# Altium PCB GE3.0.PcbDoc
Units mil, origin at the board's own origin, x right, y up, seen from the top; angles counter-clockwise.
Board outline 3543.31 x 1889.76 mil, 2 copper layers (Top Layer, Bottom Layer); 52 components, 120 nets, 376 pads, 110 vias.
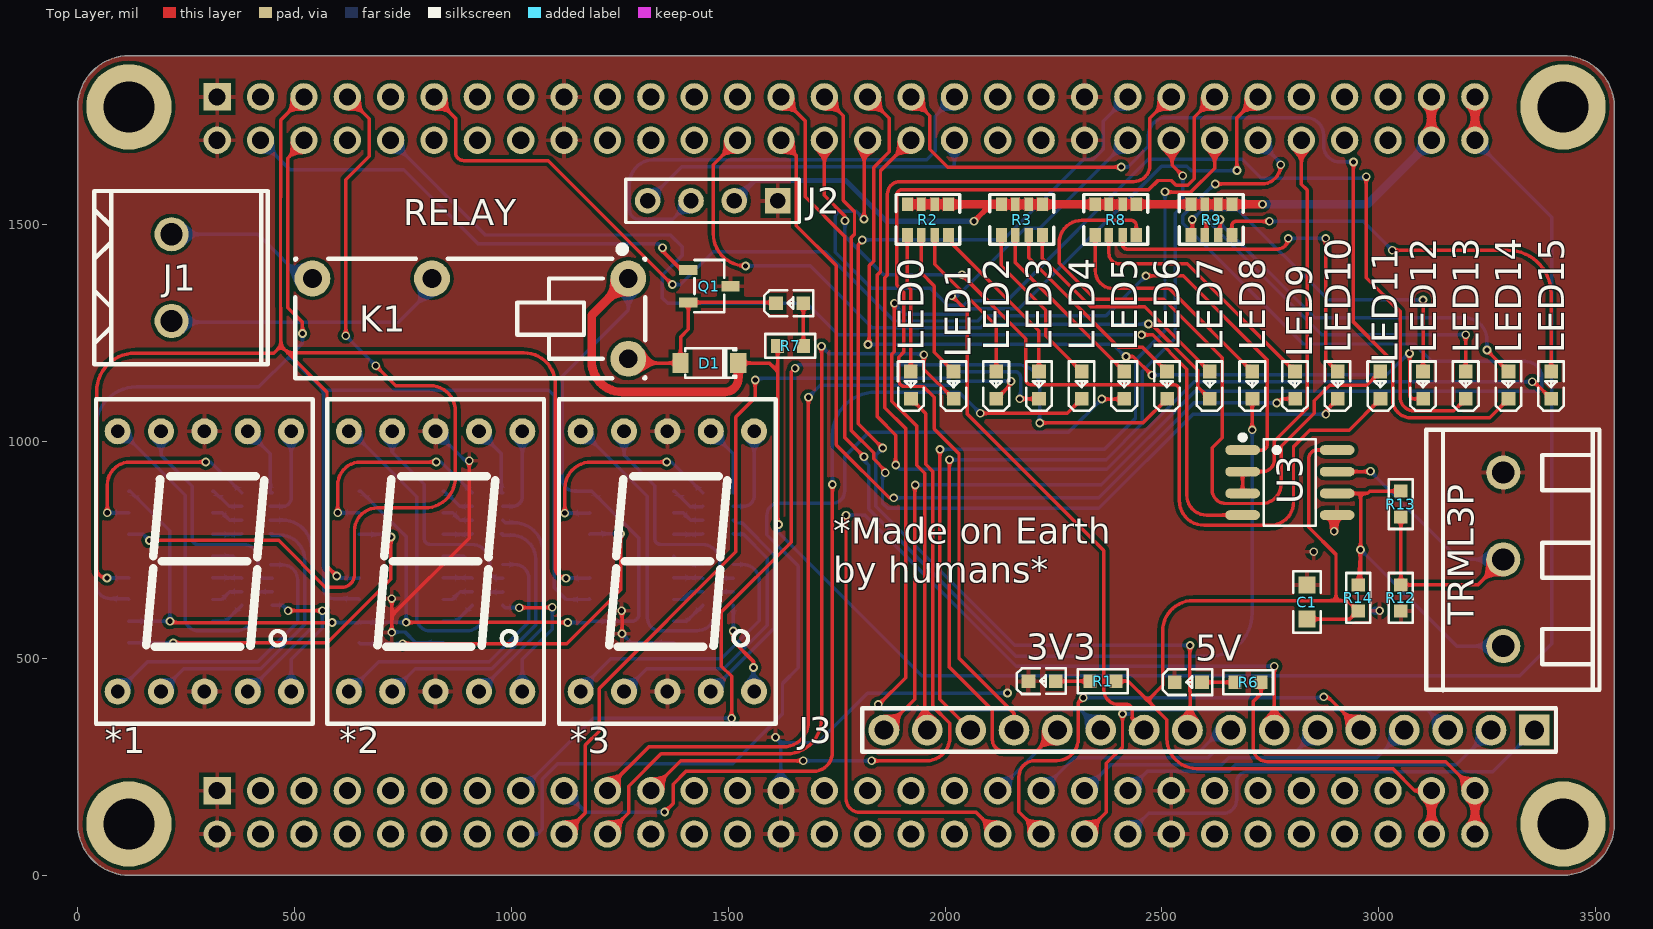
[diagram p0: Top Layer view]
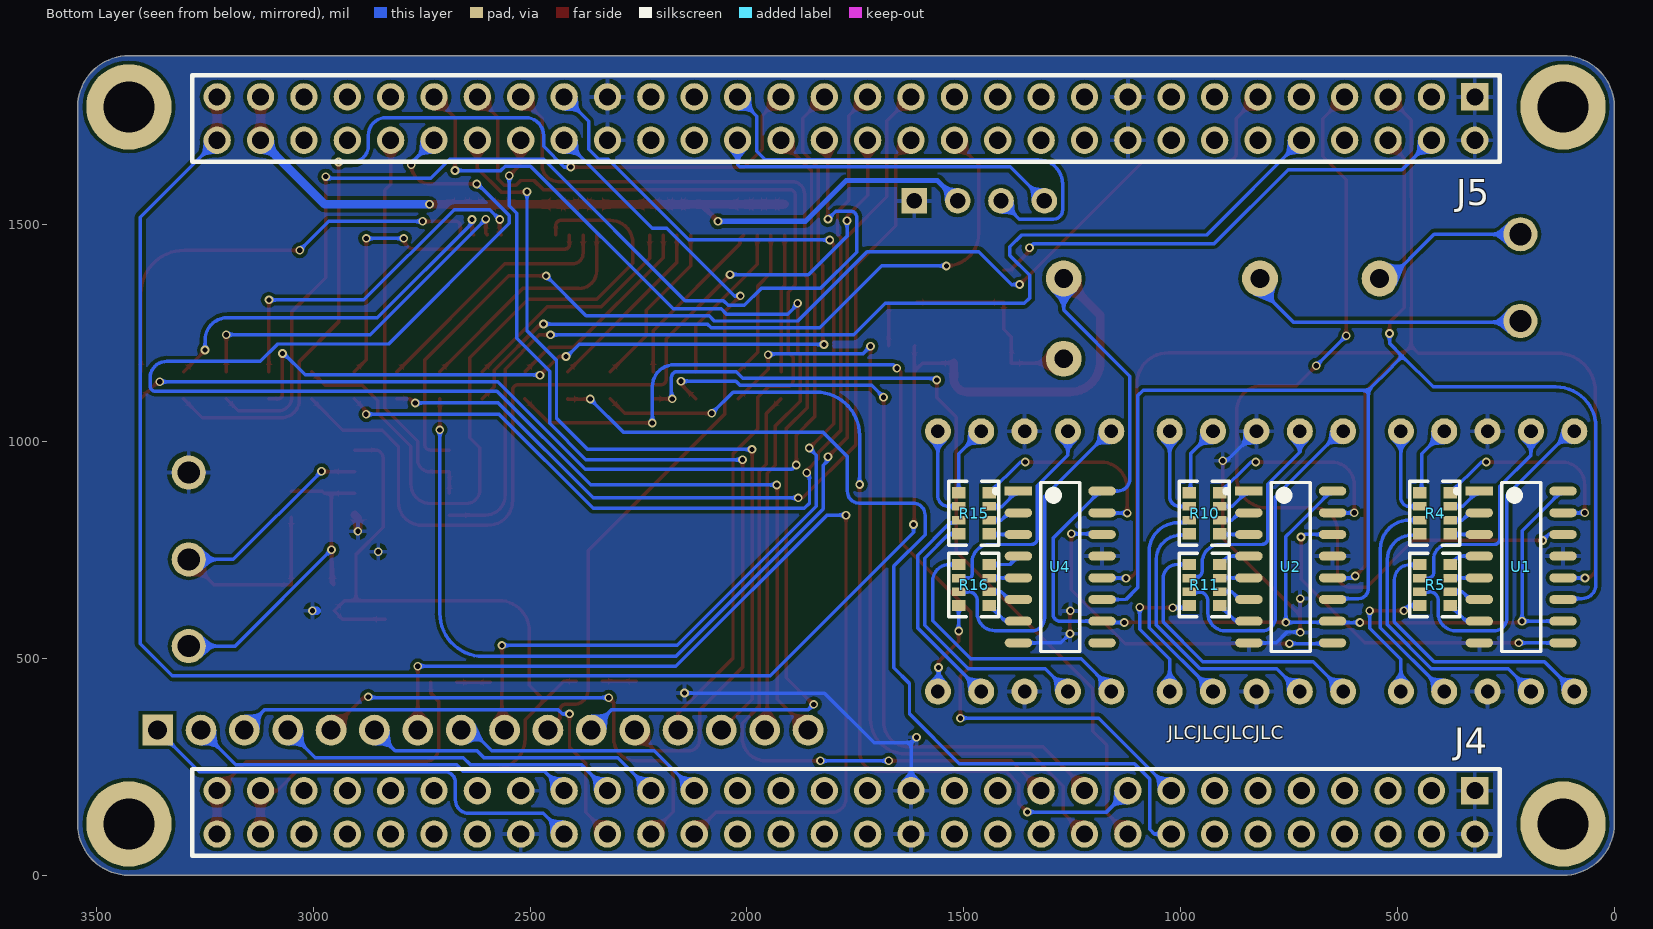
[diagram p1: Bottom Layer view, seen from below]

## Layer stack, top to bottom
Top Solder: solder mask 0.4, Solder Resist, Dk 3.5
Top Layer: signal copper 1.4
Dielectric 1: dielectric 12.6, FR-4, Dk 4.8
Bottom Layer: signal copper 1.4
Bottom Solder: solder mask 0.4, Solder Resist, Dk 3.5

## Board outline
0,118.11 0,1771.65 cw(c118.11,1771.65) 118.11,1889.76 3425.2,1889.76 cw(c3425.2,1771.65) 3543.31,1771.65 3543.31,118.11 cw(c3425.2,118.11) 3425.2,0 118.11,0 cw(c118.11,118.11)

## Design rules (kind name [scope] priority, off if disabled: settings)
Clearance [All] p1: gap=8 ignorepadtopadclearanceinfootprint=FALSE except(0: Arc-Hole Track-Hole SMDPad-Hole THPad-Hole Via-Hole Fill-Hole Poly-Hole Region-Hole Text-Hole; 10: THPad-THPad)
ComponentClearance [All] p1: gap=10 collisioncheckmode=3 verticalgap=0 showdistances=FALSE
HoleSize [All] p1: absolutevalues=TRUE maxlimit=248 minlimit=12 maxpercent=80.000 minpercent=20.000
HoleToHoleClearance [All] p1: gap=2 allowstackedmicrovias=TRUE
MinimumSolderMaskSliver [All] p1: minsoldermaskwidth=0
PlaneConnect [All] p1: planeconnectstyle=Direct reliefexpansion=20 reliefentries=4 reliefconductorwidth=10 reliefairgap=10
PolygonConnect [All] p1: connectstyle=Relief reliefconductorwidth=10 reliefentries=4 polygonreliefangle="90 Angle" airgapwidth=10
RoutingVias [All] p1: holewidth=12 width=20 viastyle="Through Hole" minholewidth=12 minwidth=20 maxholewidth=248 maxwidth=248
SilkToSilkClearance [All] p1: silktosilkclearance=0
SilkToSolderMaskClearance [IsPad] p1: minsilkscreentomaskgap=-1 clearancetoexposedcopper=TRUE
SolderMaskExpansion [IsVia] p1: expansion=4 istentingtop=TRUE
Width [All] p1: maxlimit=100 minlimit=8 preferedwidth=8
23 further rules are at their usual default settings.

## Components (designator, comment, footprint, x,y, rotation, side; value= is the part's Value field where it differs from the comment)
3V3 "NCD0603R1_C84263" LED0603-RD_RED 2223.84,447.3 r0 top
5V "NCD0603R1_C84263" LED0603-RD_RED 2561.02,444.88 r0 top
*1 "7SEG" SM410561N 292.13,723.62 r0 top
*2 "7SEG" SM410561N 825.2,723.62 r0 top
*3 "7SEG" SM410561N 1359.84,723.62 r0 top
C1 "100nF" 0805C 2834.65,629.92 r90 top
D1 "1N4148W" SOD-123_L2.8-W1.8-LS3.7-RD 1456.69,1181.1 r180 top
J1 "Terminal 2P" TRML2P 216.54,1377.95 r270 top
J2 "HDR1X4" HDR1X4 1614.17,1555.12 r180 top
J3 "HDR1X16" HDR1X16 2609.06,334.65 r180 top
J4 "HDR2X30" HDR2x30 1771.65,144.88 r0 bottom locked
J5 "HDR2X30" HDR2x30 1771.65,1744.88 r0 bottom
K1 "HF46F" RELAY-TH_HF46F-5-HS1T 905.51,1283.46 r180 top
LED0 "NCD0603R1_C84263" LED0603-RD_RED 1921.4,1129.94 r90 top
LED1 "NCD0603R1_C84263" LED0603-RD_RED 2019.82,1129.94 r90 top
LED2 "NCD0603R1_C84263" LED0603-RD_RED 2118.25,1129.94 r90 top
LED3 "NCD0603R1_C84263" LED0603-RD_RED 2216.67,1129.94 r90 top
LED4 "NCD0603R1_C84263" LED0603-RD_RED 2315.1,1129.94 r90 top
LED5 "NCD0603R1_C84263" LED0603-RD_RED 2413.52,1129.94 r90 top
LED6 "NCD0603R1_C84263" LED0603-RD_RED 2511.95,1129.94 r90 top
LED7 "NCD0603R1_C84263" LED0603-RD_RED 2610.37,1129.94 r90 top
LED8 "NCD0603R1_C84263" LED0603-RD_RED 2708.8,1129.94 r90 top
LED9 "NCD0603R1_C84263" LED0603-RD_RED 2807.22,1129.94 r90 top
LED10 "NCD0603R1_C84263" LED0603-RD_RED 2905.65,1129.94 r90 top
LED11 "NCD0603R1_C84263" LED0603-RD_RED 3004.07,1129.94 r90 top
LED12 "NCD0603R1_C84263" LED0603-RD_RED 3102.5,1129.94 r90 top
LED13 "NCD0603R1_C84263" LED0603-RD_RED 3200.92,1129.94 r90 top
LED14 "NCD0603R1_C84263" LED0603-RD_RED 3299.35,1129.94 r90 top
LED15 "NCD0603R1_C84263" LED0603-RD_RED 3397.77,1129.94 r90 top
Q1 "S8550" SOT-23-3_L2.9-W1.6-P1.90-LS2.8-BR 1456.69,1358.27 r180 top
R1 "1k" 0603R 2363.98,447.44 r0 top
R2 "1k" RES-ARRAY-SMD_0603-8P-L3.2-W1.6-BL 1960.63,1511.81 r0 top
R3 "1k" RES-ARRAY-SMD_0603-8P-L3.2-W1.6-BL 2177.17,1511.81 r0 top
R4 "470" RES-ARRAY-SMD_0603-8P-L3.2-W1.6-BL 413.39,834.65 r90 bottom
R5 "470" RES-ARRAY-SMD_0603-8P-L3.2-W1.6-BL 413.39,669.29 r90 bottom
R6 "1k" 0603R 2698.82,444.88 r0 top
R7 "1k" 0603R 1643.31,1220.47 r180 top
R8 "1k" RES-ARRAY-SMD_0603-8P-L3.2-W1.6-BL 2393.7,1511.81 r0 top
R9 "1k" RES-ARRAY-SMD_0603-8P-L3.2-W1.6-BL 2614.18,1511.81 r0 top
R10 "470" RES-ARRAY-SMD_0603-8P-L3.2-W1.6-BL 944.88,834.65 r90 bottom
R11 "470" RES-ARRAY-SMD_0603-8P-L3.2-W1.6-BL 944.88,669.3 r90 bottom
R12 "360" 0603R 3051.18,639.37 r270 top
R13 "120" 0603R 3051.18,855.91 r90 top
R14 "360" 0603R 2952.76,639.37 r90 top
R15 "470" RES-ARRAY-SMD_0603-8P-L3.2-W1.6-BL 1476.38,834.64 r90 bottom
R16 "470" RES-ARRAY-SMD_0603-8P-L3.2-W1.6-BL 1476.38,669.29 r90 bottom
RELAY "NCD0603R1_C84263" LED0603-RD_RED 1641.75,1318.76 r0 top
TRML3P "J6" TRML3P 3287.4,728.35 r270 top
U1 "74HC595D,118" FP-SOT109-1-IPC_C 214.6,710.83 r180 bottom
U2 "74HC595D,118" FP-SOT109-1-IPC_C 746.1,710.83 r180 bottom
U3 "SP3485" SP3485 2795.28,905.51 r270 top
U4 "74HC595D,118" FP-SOT109-1-IPC_C 1277.59,710.83 r180 bottom

## Footprints (in the part's own frame and the unit in brackets; to place one, negate y for a bottom-side part, rotate by r counter-clockwise, add the part's x,y. Pads: shape width x height; smd on the part's side, far side on the other; paste and mask are expansions set on the pad)
0603R [mm]
  rect 0.76x0.8 smd: 1(-0.76,0) 2(0.76,0)
  silkscreen extent -1.46,-0.7 1.46,0.7
0805C [mm]
  rect 1x1 smd: 1(-1,0) 2(1,0)
  silkscreen extent -1.8,-0.8 1.8,0.8
FP-SOT109-1-IPC_C [mil]
  rect 63.17x20.79 smd paste+0 mask+0: 1(-96.49,175)
  rrect100% 63.17x20.79 smd paste+0 mask+0: 2(-96.49,125) 3(-96.49,75) 4(-96.49,25) 5(-96.49,-25) 6(-96.49,-75) 7(-96.49,-125) 8(-96.49,-175) 9(96.49,-175) 10(96.49,-125) 11(96.49,-75) 12(96.49,-25) 13(96.49,25) 14(96.49,75) 15(96.49,125) 16(96.49,175)
  silkscreen extent -153,-195 45,195, body extent -118,-195 118,195, height 69
HDR1X4 [mm] "Connector; Header; 4 Position"
  rect 1.5x1.5 hole 0.9: 1(0,0)
  round 1.5 hole 0.9: 2(2.54,0) 3(5.08,0) 4(7.62,0)
  silkscreen extent -1.27,-1.27 8.89,1.27
HDR1X16 [mm]
  rect 1.8x1.8 hole 1.1: 1(-19.05,0)
  round 1.8 hole 1.1: 2(-16.51,0) 3(-13.97,0) 4(-11.43,0) 5(-8.89,0) 6(-6.35,0) 7(-3.81,0) 8(-1.27,0) 9(1.27,0) 10(3.81,0) 11(6.35,0) 12(8.89,0) 13(11.43,0) 14(13.97,0) 15(16.51,0) 16(19.05,0)
  silkscreen extent -20.32,-1.27 20.32,1.27
HDR2x30 [mm]
  rect 1.6x1.6 hole 1: 1(-36.83,-1.27)
  round 1.6 hole 1: 2(-36.83,1.27) 3(-34.29,-1.27) 4(-34.29,1.27) 5(-31.75,-1.27) 6(-31.75,1.27) 7(-29.21,-1.27) 8(-29.21,1.27) 9(-26.67,-1.27) 10(-26.67,1.27) 11(-24.13,-1.27) 12(-24.13,1.27) 13(-21.59,-1.27) 14(-21.59,1.27) 15(-19.05,-1.27) 16(-19.05,1.27) 17(-16.51,-1.27) 18(-16.51,1.27) 19(-13.97,-1.27) 20(-13.97,1.27) 21(-11.43,-1.27) 22(-11.43,1.27) 23(-8.89,-1.27) 24(-8.89,1.27) 25(-6.35,-1.27) 26(-6.35,1.27) 27(-3.81,-1.27) 28(-3.81,1.27) 29(-1.27,-1.27) 30(-1.27,1.27) 31(1.27,-1.27) 32(1.27,1.27) 33(3.81,-1.27) 34(3.81,1.27) 35(6.35,-1.27) 36(6.35,1.27) 37(8.89,-1.27) 38(8.89,1.27) 39(11.43,-1.27) 40(11.43,1.27) 41(13.97,-1.27) 42(13.97,1.27) 43(16.51,-1.27) 44(16.51,1.27) 45(19.05,-1.27) 46(19.05,1.27) 47(21.59,-1.27) 48(21.59,1.27) 49(24.13,-1.27) 50(24.13,1.27) 51(26.67,-1.27) 52(26.67,1.27) 53(29.21,-1.27) 54(29.21,1.27) 55(31.75,-1.27) 56(31.75,1.27) 57(34.29,-1.27) 58(34.29,1.27) 59(36.83,-1.27) 60(36.83,1.27)
  silkscreen extent -38.3,-2.54 38.3,2.54
LED0603-RD_RED [mm]
  rect 0.8x0.8 smd: 1(-0.8,-0.003) 2(0.8,0.004)
  silkscreen extent -1.49,-0.75 1.39,0.76
RELAY-TH_HF46F-5-HS1T [mm] "继电器5v"
  round 2.1 hole 1.1: 1(-9.25,-2.35) 2(2.25,-2.35) 3(9.25,-2.35) 6(-9.25,2.35)
  silkscreen extent -10.25,-4.26 10.25,3.5
RES-ARRAY-SMD_0603-8P-L3.2-W1.6-BL [mm]
  rect 0.65x0.8 smd: 1(-1.2,-0.9) 4(1.2,-0.9) 5(1.2,0.9) 8(-1.2,0.9)
  rect 0.5x0.8 smd: 2(-0.4,-0.9) 3(0.4,-0.9) 6(0.4,0.9) 7(-0.4,0.9)
  silkscreen extent -1.87,-1.45 1.87,1.47
SM410561N [mil] "一位数码管 方舟出品"
  round 60 hole 31.5: 1(-200,-300) 2(-100,-300) 3(0,-300) 4(100,-300) 5(200,-300) 6(200,300) 7(100,300) 8(0,300) 9(-100,300) 10(-200,300)
  silkscreen extent -250,-374 250,374
SOD-123_L2.8-W1.8-LS3.7-RD [mm]
  rect 0.95x1.15 smd paste+0 mask+0.051: 1(-1.692,0) 2(1.692,0)
  silkscreen extent -1.58,-0.87 1.41,0.87
SOT-23-3_L2.9-W1.6-P1.90-LS2.8-BR [mm] "S8050/S8550"
  rect 1.07x0.6 smd paste+0 mask+0.051: 1(1.235,-0.95) 2(1.235,0.95) 3(-1.235,0)
  silkscreen extent -0.88,-1.54 0.88,1.54
SP3485 [mil] "SP3485"
  oval 22.6x80.14 smd: 1(-75,-108.97) 2(-25,-108.97) 3(25,-108.97) 4(75,-108.97) 5(75,108.97) 6(25,108.97) 7(-25,108.97) 8(-75,108.97)
  silkscreen extent -110,-115 99,60
TRML2P [mm] "2P接线端子C8465"
  round 2 hole 1.3: 1(-2.54,0) 2(2.54,0)
  silkscreen extent -5.08,-4.52 5.08,5.64
TRML3P [mm] "3P接线端子直针C72334"
  round 2 hole 1.3: 1(-5.08,0) 2(0,0) 3(5.08,0)
  silkscreen extent -7.61,-4.53 7.66,5.64

## Part data
3V3 5V LED0 LED1 LED2 LED3 LED4 LED5 LED6 LED7 LED8 LED9 LED10 LED11 LED12 LED13 LED14 LED15: Emitted Color=红灯, JLCPCB Part Class="Extended Part", Manufacturer=国星光电, Manufacturer Part=NCD0603R1, Add into BOM=yes, Convert to PCB=yes, Datasheet=https://atta.szlcsc.com/upload/public/pdf/source/20200820/C84263_DABC6A75E58F576973B407FDBA283D60.pdf, Device=NCD0603R1_C84263, LCSC Part Name=红灯, Name=NCD0603R1, Supplier=LCSC, Supplier Footprint=0603, Supplier Part=C84263, Symbol=FC-DA1608HRK-620D
*1 *2 *3: "一位数码管"
C1: library part CAP, "电容"
D1: "二极管"
J1: library part TRML2P, "2P接线端子"
J2: "Connector"
K1: "5V一路继电器宏发C5252509 / https://item.szlcsc.com/5969785.html"
Q1: "PNP"
R1 R6 R7 R12 R13 R14: library part Res2, "Resistor"
R2 R3 R4 R5 R8 R9 R10 R11 R15 R16: library part RES_ARRAY_0603
RELAY: library part LED_0603, Emitted Color=红灯, JLCPCB Part Class="Extended Part", Manufacturer=国星光电, Manufacturer Part=NCD0603R1, Add into BOM=yes, Convert to PCB=yes, Datasheet=https://atta.szlcsc.com/upload/public/pdf/source/20200820/C84263_DABC6A75E58F576973B407FDBA283D60.pdf, Device=NCD0603R1_C84263, LCSC Part Name=红灯, Name=NCD0603R1, Supplier=LCSC, Supplier Footprint=0603, Supplier Part=C84263, Symbol=FC-DA1608HRK-620D
TRML3P: library part TRML3P, "3P接线端子直针"
U1 U2 U4: library part CMP-14351-000006-1, "IC SHIFT REGISTER 8BIT 16SOIC", RoHS Compliant=Yes

## Free pads (board coordinates)
  round 196.85 hole 118.11: 0(118.11,118.11) 0(3425.2,118.11) 0(3425.2,1771.65)
  round 196.85 hole 118.11 unplated: 0(118.11,1771.65)

## Via types
v1: diameter 20, hole 12, Top Layer to Bottom Layer, tented both sides, 110 vias

## Nets (pads, with @x,y where several pads share a name; then routed paths per layer and width w, separated by ;. In a path a pad name is that pad's centre, name@x,y a point inside that pad or via, vN(x,y) a via of type N, cw(c..) or ccw(c..) an arc to the next point about the centre after c; other vN are vias at no path point)
3V3DOWN: C1.1 J4.57 J4.58 R1.2 R14.1 U3.8 | length 2198.7
  Top Layer w8: R1.2 2422.64,447.44 2467.13,402.95 ; C1.1 2933.07,590.55 2951.97,609.45 2928.06,633.35 2901.57,633.35 ; U3.8 2858.24,980.51 ccw(c2858.24,960.86) 2838.58,960.86 2838.58,802.67 2901.57,739.68 2901.57,633.35 ; J4.57 3083.17,194.88 3032.03,246.02 2580.6,246.02 cw(c2580.6,315) 2511.62,315 2511.62,358.46 2467.13,402.95 ; 2467.13,402.95 2501.79,437.61 2501.79,562.57 cw(c2572.57,562.57) 2572.57,633.35 2901.57,633.35
  Top Layer w20: J4.58 J4.57
3V3UP: J2.2 J5.57 J5.58 R2.5 R2.6 R2.7 R2.8 R3.5 R3.6 R3.7 R3.8 R8.5 R8.6 R8.7 R8.8 R9.5 R9.6 R9.7 R9.8 | length 2039.4
  Top Layer w8: 2106.07,1547.02 2106.3,1547.25 ; J5.58@3121.24,1695.3 J5.58 ; J5.57@3121.24,1794.46 J5.57
  Top Layer w12: v1(2066.93,1507.87) 2106.07,1547.02
  Top Layer w20: R2.8 R2.7 R2.6 R2.5 2007.87,1547.02 2106.07,1547.02 ; 2106.3,1547.25 R3.8 2129.93,1547.02 R3.7@2161.42,1547.02 ; R3.7 R3.7@2161.42,1547.02 ; R3.6 R3.6@2192.92,1547.02 ; R3.5 R3.5@2224.41,1547.02 ; R8.8 R8.8@2346.46,1547.02 ; R8.7 R8.7@2377.95,1547.02 ; R9.7 R9.7@2598.43,1547.02 ; R9.6 R9.6@2629.93,1547.02 ; R9.5@2661.42,1547.02 2661.64,1547.24 v1(2732.28,1547.24) ; R9.5 2661.18,1547.02 R9.6@2629.93,1547.02 ; J5.58@3121.24,1695.3 J5.57@3121.24,1794.46 ; R3.7@2161.42,1547.02 R3.6@2192.92,1547.02 ; R3.6@2192.92,1547.02 R3.5@2224.41,1547.02 ; R3.5@2224.41,1547.02 R8.8@2346.46,1547.02 ; R8.8@2346.46,1547.02 R8.7@2377.95,1547.02 ; R8.7@2377.95,1547.02 2409.45,1547.02 R8.6 R8.5 2534.23,1547.24 R9.8 2566.94,1547.02 R9.7@2598.43,1547.02 ; R9.7@2598.43,1547.02 R9.6@2629.93,1547.02
  Bottom Layer w12: J2.2 1561.42,1602.36 1770.89,1602.36 1865.38,1507.87 v1(2066.93,1507.87)
  Bottom Layer w20: v1(2732.28,1547.24) 2974.02,1547.24 J5.58
5VDOWN: J4.59 J4.60 R6.2 | length 815.4
  Top Layer w8: R6.2 2728.74,419.02 2711.24,401.51 2711.24,293.31 ccw(c2742.53,293.31) 2742.53,262.02 3154.52,262.02 J4.59@3222.24,194.3 ; J4.60 J4.60@3222.24,95.46
  Top Layer w20: J4.60@3222.24,95.46 J4.59@3222.24,194.3
5VUP: D1.1 J5.59 J5.60 K1.1 R7.2 U1.10 U1.16 U2.10 U2.16 U4.10 U4.16 | length 7292.7
  Top Layer w8: v1(212.6,585.83) 215.75,582.68 v1(586.61,582.68) ; v1(757.24,583.02) 1129.58,583.02 v1(1129.92,582.68) ; D1.1 1594.49,1181.1 1614.17,1161.42 ; R7.2 1614.17,1219.68 1614.17,1161.42 ; v1(1615.81,808.85) 1615.81,812.26 1614.24,813.84 1614.24,1161.35 1614.17,1161.42 ; J5.60 J5.60@3222.24,1695.46 ; J5.59 J5.59@3222.24,1794.3
  Top Layer w20: K1.1 1185.04,1291.34 1185.04,1185.21 ccw(c1256.08,1185.21) 1256.08,1114.17 1491.48,1114.17 ccw(c1491.48,1146.02) 1523.32,1146.02 D1.1 ; J5.60@3222.24,1695.46 J5.59@3222.24,1794.3
  Bottom Layer w8: U1.10 v1(212.6,585.83) 212.6,794.2 120.97,885.83 U1.16 ; v1(586.61,582.68) 646.46,582.68 U2.10 652.75,582.68 653.09,583.02 v1(757.24,583.02) 757.24,781.05 744.09,794.2 652.47,885.83 U2.16 ; v1(1129.92,582.68) 1177.95,582.68 U4.10 1278.05,585.83 ccw(c1278.05,602.02) 1294.24,602.02 1294.24,776.63 1185.04,885.83 U4.16 1145.24,885.83 cw(c1145.24,913.83) 1117.24,913.83 1117.24,1151.02 1269.68,1303.46 K1.1 ; v1(1615.81,808.85) 1615.81,790.44 1946.24,460.02 3325.24,460.02 3399.24,534.02 3399.24,1517.3 J5.60
GND: 3V3.1 5V.1 *1.3 *1.8 *2.3 *2.8 *3.3 *3.8 C1.2 J2.1 J4.1 J4.2 J4.27 J4.28 J4.45 J4.46 J5.1 J5.2 J5.17 J5.18 J5.41 J5.42 Q1.3 R12.2 TRML3P.1 U1.8 U1.13 U2.8 U2.13 U3.5 U4.8 U4.13 | length 1673.1
  Top Layer w8: v1(724.09,637.87) 724.24,637.73 724.24,598.87 ; v1(724.24,560.02) 724.24,598.87 ; v1(902.71,955.62) 902.71,777.35 724.24,598.87 ; v1(1254.24,610.02) 1255.24,609.02 v1(1255.24,557.02)
  Top Layer w20: v1(2897.24,793.02) 2897.24,823.51 U3.5
  Bottom Layer w8: v1(724.24,560.02) 725.1,560.88 754.8,560.88 779.86,535.83 U2.8 ; *2.8 893.2,955.62 v1(902.71,955.62) ; v1(1255.24,557.02) 1276.43,535.83 U4.8 ; v1(1609.24,318.02) 1621.65,305.6 ; J4.27 1621.65,305.6 ; v1(2144.24,420.02) 1821.24,420.02 1706.82,305.6 1621.65,305.6
  Bottom Layer w20: v1@2992.24,610.02 v1(3002.24,610.02)
  other v1: 2850.24,746.02
Net3V3_2: 3V3.2 R1.1 | length 78.7
  Top Layer w8: 3V3.2 R1.1
Net5V_2: 5V.2 R6.1 | length 76.5
  Top Layer w8: 5V.2 2592.64,444.88 R6.1
NetD1_2: D1.2 K1.6 Q1.2 RELAY.1 | length 474.8
  Top Layer w8: K1.6 1279.52,1181.1 D1.2 1390.06,1241.02 1408.07,1259.02 Q1.2 1608.03,1320.87 RELAY.1
NetJ1_1: J1.1 K1.3 | length 376.8
  Bottom Layer w8: J1.1 415.75,1477.95 529.53,1364.17 K1.3@541.34,1352.36
NetJ1_2: J1.2 K1.2 | length 633.5
  Bottom Layer w8: J1.2 219.23,1275.26 739.83,1275.26 K1.2@816.93,1352.36
NetLED0_2: LED0.2 R2.1 | length 318.2
  Top Layer w8: R2.1 1913.39,1358.86 1921.26,1350.99 LED0.2
NetLED1_2: LED1.2 R2.2 | length 345.9
  Top Layer w8: R2.2 1944.88,1389.02 1975.24,1358.66 1975.24,1205.87 LED1.2
NetLED2_2: LED2.2 R2.3 | length 373.7
  Top Layer w8: R2.3 1976.38,1408.76 2035.12,1350.02 2118.11,1267.03 LED2.2
NetLED3_2: LED3.2 R2.4 | length 401.4
  Top Layer w8: R2.4 2016.63,1467.62 2016.63,1455.62 2216.54,1255.72 LED3.2
NetLED4_2: LED4.2 R3.1 | length 391.6
  Top Layer w8: R3.1 2129.93,1405.54 2232.54,1302.93 2232.54,1243.84 LED4.2
NetLED5_2: LED5.2 R3.2 | length 419.3
  Top Layer w8: R3.2 2161.42,1413.38 LED5.2
NetLED6_2: LED6.2 R3.3 | length 479.8
  Top Layer w8: R3.3 2192.92,1424.33 2399.24,1218.02 2455.21,1218.02 LED6.2
NetLED7_2: LED7.2 R3.4 | length 547.5
  Top Layer w8: R3.4 2224.41,1423.02 2336.41,1311.02 2460.64,1311.02 LED7.2
NetLED8_2: LED8.2 R8.1 | length 547.3
  Top Layer w8: R8.1 2346.46,1394.02 ccw(c2387.46,1394.02) 2387.46,1353.02 2517.06,1353.02 LED8.2
NetLED9_2: LED9.2 R8.2 | length 588.2
  Top Layer w8: R8.2 2377.95,1434.02 ccw(c2401.95,1434.02) 2401.95,1410.02 2558.49,1410.02 LED9.2
NetLED10_2: LED10.2 R8.3 | length 829
  Top Layer w8: R8.3 2409.45,1454.02 ccw(c2419.45,1454.02) 2419.45,1444.02 2766.85,1444.02 ccw(c2766.85,1468.5) v1(2791.34,1468.5) ; v1(2877.95,1468.5) 2877.95,1188.98 LED10.2
  Bottom Layer w8: v1(2791.34,1468.5) v1(2877.95,1468.5)
NetLED11_2: LED11.2 R8.4 | length 1670
  Top Layer w8: R8.4 2440.94,1498.28 ccw(c2429.21,1498.28) 2429.21,1510.02 2315.24,1510.02 ccw(c2315.24,1458.02) 2263.24,1458.02 2263.24,1411.02 2346.24,1328.02 2504.24,1328.02 2639.24,1193.02 2639.24,1009.02 2616.24,986.02 2616.24,888.02 ccw(c2647.04,888.02) 2647.04,857.21 2730.24,857.21 ccw(c2730.24,902.08) 2775.11,902.08 2775.11,988.89 2851.24,1065.02 2851.24,1094.02 2887.24,1130.02 2972.53,1130.02 LED11.2
NetLED12_2: LED12.2 R9.1 | length 832.8
  Top Layer w8: R9.1 2573.24,1482.68 2570.24,1485.68 v1(2570.24,1512.13) ; LED12.2 v1(3102.36,1326.77)
  Bottom Layer w8: v1(2570.24,1512.13) 2593.12,1535.02 2675.42,1535.02 2883.66,1326.77 v1(3102.36,1326.77)
NetLED13_2: LED13.2 R9.2 | length 832.3
  Top Layer w8: R9.2 2602.24,1480.19 v1(2602.24,1513.02) ; LED13.2 v1(3200.79,1246.46)
  Bottom Layer w8: v1(2602.24,1513.02) 2602.24,1512.9 2868.68,1246.46 v1(3200.79,1246.46)
NetLED14_2: LED14.2 R9.3 | length 874.4
  Top Layer w8: R9.3 2634.24,1480.69 v1(2634.24,1512.02) ; v1(3249.61,1211.02) LED14.2
  Bottom Layer w8: v1(2634.24,1512.02) 2634.24,1504.31 2633.86,1503.94 2852.16,1285.64 3197.99,1285.64 cw(c3197.99,1234.02) 3249.61,1234.02 v1(3249.61,1211.02)
NetLED15_2: LED15.2 R9.4 | length 1027.8
  Top Layer w8: R9.4 2661.42,1498.05 cw(c2671.24,1498.05) 2671.24,1507.87 2692.91,1507.87 v1(2748.03,1507.87) ; v1(3031.5,1440.95) 3297.64,1440.95 cw(c3297.64,1340.95) 3397.64,1340.95 LED15.2
  Bottom Layer w8: v1(2748.03,1507.87) 2964.57,1507.87 v1(3031.5,1440.95)
NetR4_1: R4.1 U1.3 | length 67.5
  Bottom Layer w8: U1.3 376.37,785.83 R4.1
NetR4_2: R4.2 U1.2 | length 73.9
  Bottom Layer w8: U1.2 333.47,835.83 350.39,818.9 R4.2
NetR4_3: R4.3 U1.1 | length 81.5
  Bottom Layer w8: U1.1 313.95,885.83 349.38,850.4 R4.3
NetR4_4: R4.4 U1.15 | length 483.5
  Top Layer w8: v1(68.11,835.83) 68.11,899.96 cw(c120.9,899.96) 120.9,952.76 v1(295.27,952.76)
  Bottom Layer w8: v1(68.11,835.83) U1.15 ; v1(295.27,952.76) 307.08,952.76 R4.4
NetR5_1: R5.1 U1.7 | length 81.9
  Bottom Layer w8: U1.7 341.72,585.83 R5.1
NetR5_2: R5.2 U1.6 | length 74.2
  Bottom Layer w8: U1.6 332.68,635.83 350.39,653.54 R5.2
NetR5_3: R5.3 U1.5 | length 67.2
  Bottom Layer w8: U1.5 377.17,685.83 R5.3
NetR5_4: R5.4 U1.4 | length 74.8
  Bottom Layer w8: U1.4 358.66,735.83 R5.4
NetR7_1: R7.1 RELAY.2 | length 98.4
  Top Layer w8: R7.1 RELAY.2
NetR10_1: R10.1 U2.3 | length 67.5
  Bottom Layer w8: U2.3 907.87,785.83 R10.1
NetR10_2: R10.2 U2.2 | length 73.9
  Bottom Layer w8: U2.2 864.96,835.83 881.89,818.9 R10.2
NetR10_3: R10.3 U2.1 | length 81.5
  Bottom Layer w8: U2.1 845.45,885.83 880.88,850.4 R10.3
NetR10_4: R10.4 U2.15 | length 483.5
  Top Layer w8: v1(599.61,835.83) 599.61,899.97 cw(c652.4,899.97) 652.4,952.76 v1(826.77,952.76)
  Bottom Layer w8: v1(599.61,835.83) U2.15 ; v1(826.77,952.76) 838.58,952.76 R10.4
NetR11_1: R11.1 U2.7 | length 81.9
  Bottom Layer w8: U2.7 873.22,585.83 R11.1
NetR11_2: R11.2 U2.6 | length 74.2
  Bottom Layer w8: U2.6 864.17,635.83 881.89,653.55 R11.2
NetR11_3: R11.3 U2.5 | length 67.2
  Bottom Layer w8: U2.5 908.66,685.83 R11.3
NetR11_4: R11.4 U2.4 | length 74.8
  Bottom Layer w8: U2.4 890.15,735.83 R11.4
NetR12_1: R12.1 R13.1 TRML3P.2 U3.7 | length 885.3
  Top Layer w8: U3.7 2979.73,930.51 v1(2980.98,931.76) ; R13.1 R12.1 3228.35,669.29 TRML3P.2
  Bottom Layer w8: v1(2980.98,931.76) 3184.4,728.35 TRML3P.2
NetR13_2: R13.2 R14.2 TRML3P.3 U3.6 | length 865.4
  Top Layer w8: U3.6 2958.24,880.51 ; R13.2 2979.55,885.83 2974.24,880.51 2958.24,880.51 ; v1(2958.21,750.65) 2958.21,674.75 R14.2 v1(2958.21,750.65) ; v1(2958.21,750.65) 2958.24,751.03 2958.24,880.51
  Bottom Layer w8: v1(2958.21,750.65) 3180.51,528.35 TRML3P.3
NetR15_1: R15.1 U4.3 | length 67.5
  Bottom Layer w8: U4.3 1439.37,785.83 R15.1
NetR15_2: R15.2 U4.2 | length 73.9
  Bottom Layer w8: U4.2 1396.46,835.83 1413.39,818.9 R15.2
NetR15_3: R15.3 U4.1 | length 82
  Bottom Layer w8: U4.1 1376.95,885.83 1412.88,849.89 1440.44,849.89 R15.3
NetR15_4: R15.4 U4.15 | length 497
  Top Layer w8: v1(1123.24,835.02) 1123.24,892.1 cw(c1183.9,892.1) 1183.9,952.76 v1(1358.27,952.76)
  Bottom Layer w8: v1(1123.24,835.02) 1180.29,835.02 U4.15 ; v1(1358.27,952.76) 1370.07,952.76 R15.4
NetR16_1: R16.1 U4.7 | length 81.9
  Bottom Layer w8: U4.7 1404.72,585.83 R16.1
NetR16_2: R16.2 U4.6 | length 74.2
  Bottom Layer w8: U4.6 1395.67,635.83 1413.39,653.54 R16.2
NetR16_3: R16.3 U4.5 | length 67.2
  Bottom Layer w8: U4.5 1440.16,685.83 R16.3
NetR16_4: R16.4 U4.4 | length 74.9
  Bottom Layer w8: U4.4 1393.38,716.53 R16.4
NetU1_9: U1.9 U2.14 | length 837.4
  Top Layer w8: v1(220.08,535.83) 575.2,535.83 722.24,682.87 v1(722.24,780.02)
  Bottom Layer w8: U1.9 v1(220.08,535.83) ; U2.14 649.8,786.02 712.99,786.02 718.99,780.02 v1(722.24,780.02)
NetU2_9: U2.9 U4.14 | length 855.5
  Top Layer w8: v1(749.24,534.02) 1128.11,534.02 1129.92,535.83 1251.97,657.87 v1(1251.97,787.4)
  Bottom Layer w8: U2.9 651.42,534.02 v1(749.24,534.02) ; U4.14 1182.68,787.4 v1(1251.97,787.4)
PA2: J5.10 U3.4 | length 2633.5
  Top Layer w8: v1(2453.24,1246.02) 2478.61,1246.02 2557.47,1167.16 2557.47,876.28 ccw(c2603.24,876.28) 2603.24,830.51 U3.4
  Bottom Layer w8: J5.10 940.16,1476.38 1366.14,1476.38 1393.7,1448.82 1393.7,1429.13 1348.24,1383.67 1348.24,1331.02 1360.24,1319.02 1681.24,1319.02 1754.24,1246.02 v1(2453.24,1246.02)
PA3: J5.11 U3.1 | length 2629.7
  Top Layer w8: J5.11 871.24,1745.3 871.24,1667.02 ccw(c890.24,1667.02) 890.24,1648.02 1085.24,1648.02 v1(1371.24,1362.02) ; v1(2463.24,1382.02) 2549.24,1382.02 2743.11,1188.14 2743.11,993.31 cw(c2730.32,993.31) 2730.32,980.51 U3.1
  Bottom Layer w8: v1(1371.24,1362.02) 1389.24,1362.02 1465.24,1438.02 1723.24,1438.02 1883.24,1278.02 2075.24,1278.02 2087.18,1289.96 2371.18,1289.96 v1(2463.24,1382.02)
PB10: J2.3 J5.35 | length 1120.4
  Bottom Layer w8: J2.3 1372.07,1513.02 1293.24,1513.02 cw(c1293.24,1534.02) 1272.24,1534.02 1272.24,1594.02 cw(c1328.08,1594.02) 1328.08,1649.86 1958.08,1649.86 1977.24,1669.02 1977.24,1750.46 J5.35
PB11: J2.4 J5.36 | length 798.4
  Bottom Layer w8: J2.4 1392.91,1633.86 2016.97,1633.86 2021.65,1638.54 J5.36
PC0: J5.4 Q1.1 | length 1114.7
  Top Layer w8: v1(1348.43,1446.85) 1348.43,1439.48 1392.24,1395.67 Q1.1
  Bottom Layer w8: J5.4 489.52,1627.02 752.24,1627.02 922.56,1456.69 1338.58,1456.69 v1(1348.43,1446.85)
PC1: J5.5 U1.12 U2.12 U4.12 | length 3387.6
  Top Layer w8: v1(67.64,685.43) 66.93,685.04 cw(c66.93,708.47) 43.5,708.47 43.5,1114.95 cw(c132.49,1114.95) 132.49,1203.94 451.97,1203.94 468.5,1220.47 ; J5.5 468.29,1741.51 467.63,1381.67 ccw(c909.94,1381.61) 467.63,1378.8 468.5,1241.99 468.5,1220.47 ; v1(597.24,690.02) 574.8,712.45 574.8,1114.17 484.25,1204.72 ; v1(1125.98,685.04) cw(c1125.98,709.79) 1101.24,709.79 1101.24,1132.43 ccw(c1028.94,1132.43) 1028.94,1204.72 484.25,1204.72 ; 468.5,1220.47 484.25,1204.72
  Bottom Layer w8: v1(67.64,685.43) 117.72,685.43 U1.12 ; v1(597.24,690.02) 600.48,690.02 605.46,685.04 648.82,685.04 U2.12 ; v1(1125.98,685.04) 1180.32,685.04 U4.12
PC2: J5.6 U1.11 U2.11 U4.11 | length 3266.6
  Top Layer w8: v1(518.24,1249.02) 518.24,1275.02 484.25,1309 484.25,1389.76 484.25,1653.54 521.65,1690.95 J5.6
  Bottom Layer w8: U1.11 116.14,637.8 74.8,637.8 cw(c74.8,670.36) 42.24,670.36 42.24,1033.13 cw(c135.09,1033.13) 135.09,1125.98 417.4,1125.98 488.5,1197.09 ; v1(518.24,1249.02) 518.24,1226.82 488.5,1197.09 ; U2.11 647.64,637.8 590.55,637.8 cw(c590.55,661.42) 566.93,661.42 566.93,1118.11 ; U4.11 1179.13,637.8 1177.16,635.83 1125.98,635.83 1098.43,663.39 1098.43,1106.3 1086.61,1118.11 566.93,1118.11 ; 488.5,1197.09 512.36,1173.23 512.36,1172.67 566.93,1118.11
PC3: J5.7 U1.14 | length 2072
  Top Layer w8: v1(165.24,772.02) 463.24,772.02 571.24,664.02 609.24,664.02 ccw(c609.24,693.02) 638.24,693.02 638.24,794.02 cw(c691.24,794.02) 691.24,847.02 800.24,847.02 ccw(c800.24,917.64) 870.86,917.64 870.86,1070.39 ccw(c812.24,1070.39) 812.24,1129.02 733.24,1129.02 v1(687.24,1175.02) ; v1(618.24,1244.02) 618.24,1604.02 672.24,1658.02 672.24,1744.29 J5.7
  Bottom Layer w8: U1.14 151.43,785.83 v1(165.24,772.02) ; v1(618.24,1244.02) v1(687.24,1175.02)
PD0: J3.1 J4.44 | length 1069
  Bottom Layer w8: J4.44 2469.79,143.02 2641.87,143.02 ccw(c2641.87,173.56) 2672.41,173.56 2672.41,214.02 cw(c2696.77,214.02) 2696.77,238.38 3262.79,238.38 J3.1
PD1: J3.2 J4.43 | length 895.3
  Bottom Layer w8: J4.43 2465.98,239.21 2654.49,239.21 2669.65,254.38 3178.79,254.38 J3.2
PD2: J3.3 J4.42 | length 1087
  Top Layer w8: J4.42 2372.05,145.27 2372.05,257.83 2409.24,295.02 v1(2409.24,372.02)
  Bottom Layer w8: v1(2409.24,372.02) 2426.24,372.02 2436.3,382.08 3111.62,382.08 J3.3
PD3: J3.4 J4.41 | length 795.3
  Bottom Layer w8: J4.41 2381.98,255.21 2638.49,255.21 2654.49,271.21 2995.62,271.21 J3.4
PD4: J3.5 J4.40 | length 1112.9
  Top Layer w8: J4.40 2170.28,146.26 2170.28,227.06 cw(c2207.24,227.06) 2207.24,264.02 2257.24,264.02 ccw(c2257.24,314.02) 2307.24,314.02 2307.24,397.79 v1(2318.9,409.45) ; v1(2873.45,411.23) 2882.47,411.23 J3.5
  Bottom Layer w8: v1(2318.9,409.45) 2871.67,409.45 v1(2873.45,411.23)
PD5: J3.6 J4.39 | length 695.3
  Bottom Layer w8: J4.39 2297.98,271.21 2606.49,271.21 2622.49,287.21 2811.62,287.21 J3.6
PD6: J3.7 J4.38 | length 2321.3
  Top Layer w8: v1(1771.65,830.25) 1771.65,177.17 ccw(c1804.13,177.17) 1804.13,144.68 2071.85,144.68 J4.38 ; J3.7 v1(2759.05,482.02)
  Bottom Layer w8: v1(1771.65,830.25) 1815.58,830.25 2163.81,482.02 v1(2759.05,482.02)
PD7: J3.8 J4.37 | length 595.3
  Bottom Layer w8: J4.37 2213.98,287.21 2588.43,287.21 2635.87,334.65 J3.8
PD8: J3.9 J5.43 | length 2492.5
  Top Layer w8: v1(1809.24,1465.02) 1809.24,1463.33 1800.24,1454.33 1800.24,1041.02 v1(1856.24,985.02) ; J3.9 2557.29,336.41 2565.24,344.36 2565.24,423.82 2564.75,424.3 2564.75,529.53 v1(2565.24,530.02)
  Bottom Layer w8: v1(1809.24,1465.02) 2134.24,1465.02 2320.24,1651.02 2342.24,1651.02 2365.24,1674.02 2365.24,1738.46 J5.43 ; v1(1856.24,985.02) 1839.86,968.64 1839.86,851.23 2161.07,530.02 v1(2565.24,530.02)
PD9: J3.10 J5.44 | length 1758.6
  Top Layer w8: v1(2015.24,1336.02) 2051.73,1299.52 2051.73,1063.25 2366.24,748.75 2366.24,427.42 ccw(c2399.64,427.42) 2399.64,394.02 2418.35,394.02 cw(c2418.35,381.13) 2431.24,381.13 2431.24,362.76 2431.09,362.61 2431.23,362.47 J3.10
  Bottom Layer w8: v1(2015.24,1336.02) 2029.24,1336.02 2185.06,1491.84 2218.61,1491.84 J5.44
PD10: J3.11 J5.45 | length 2584.7
  Top Layer w8: v1(1846.24,394.02) 1847.65,394.02 1909.24,455.6 1909.24,1030.22 1861.24,1078.22 1861.24,1378.02 1867.24,1384.02 1867.24,1570.83 cw(c1896,1570.83) 1896,1599.59 2434.81,1599.59 ccw(c2434.81,1637.22) 2472.44,1637.22 2472.44,1745.67 J5.45
  Bottom Layer w8: v1(1846.24,394.02) 1858.17,382.08 2311.62,382.08 J3.11
PD11: J3.12 J5.46 | length 2053.1
  Top Layer w8: v1(2010.24,958.02) 2010.24,480.02 2109.24,381.02 2109.24,312.02 ccw(c2134.24,312.02) 2134.24,287.02 2211.42,287.02 J3.12 ; J5.46 2523.62,1692.91 2523.62,1637.63 v1(2548.24,1613.02)
  Bottom Layer w8: v1(2010.24,958.02) 2371.4,958.02 2455.24,1041.85 2455.24,1162.13 2530.94,1237.83 2530.94,1526.57 2548.24,1543.87 v1(2548.24,1613.02)
PD12: J3.13 J5.47 | length 2303.7
  Top Layer w8: J3.13 2159.05,373.95 2032.24,500.77 2032.24,972.02 1975.24,1029.02 1975.24,1102.02 1950.24,1127.02 1907.2,1127.02 cw(c1907.2,1140.7) 1893.51,1140.7 1893.51,1194.73 1905.24,1206.46 1905.24,1344.39 1888.6,1361.03 1888.6,1567.97 cw(c1901.84,1567.97) 1901.84,1581.21 2470.24,1581.21 2491.05,1602.02 2521.71,1602.02 2532.73,1591 2559.5,1591 2574.8,1606.3 2574.8,1748.03 J5.47
PD13: J3.14 J5.48 | length 1910.2
  Top Layer w8: v1(1988.24,982.02) 1988.24,405.46 J3.14 ; v1(2507.24,1576.02) 2508.26,1575 2566.13,1575 2621.65,1630.52 J5.48
  Bottom Layer w8: v1(1988.24,982.02) 2367.84,982.02 2439.24,1053.41 2439.24,1187.12 2507.24,1255.12 v1(2507.24,1576.02)
PD14: J3.15 J5.49 | length 2157.4
  Top Layer w8: v1(1883.24,1319.02) 1883.24,1207.08 1877.51,1201.36 1877.51,1092.97 1934.53,1035.95 1934.53,945.58 1953.24,926.87 1953.24,340.46 J3.15 ; v1(2673.23,1625) 2673.23,1746.46 J5.49
  Bottom Layer w8: v1(1883.24,1319.02) 1883.24,1317.02 1906.24,1294.02 2047.3,1294.02 2059.24,1305.96 2170.18,1305.96 2499.24,1635.02 2557.35,1635.02 2567.36,1625 v1(2673.23,1625)
PD15: J3.16 J5.50 | length 3514.9
  Top Layer w8: J3.16 1930.24,405.83 1930.24,898.9 v1(1931.24,899.9) ; v1(2623.24,1594.02) 2730.02,1594.02 ccw(c2730.02,1638.23) v1(2774.24,1638.23)
  Bottom Layer w8: v1(1931.24,899.9) 1931.35,900.02 2360.65,900.02 2576.43,1115.8 3363.44,1115.8 ccw(c3363.44,1128.68) 3376.33,1128.68 3376.33,1146.91 ccw(c3338.22,1146.91) 3338.22,1185.02 3122.24,1185.02 3082.24,1225.02 2826.24,1225.02 2548.24,1503.02 2548.24,1521.24 2621.01,1594.02 v1(2623.24,1594.02) ; J5.50 2774.24,1642.3 v1(2774.24,1638.23)
PE0: J4.21 LED0.1 | length 1566.5
  Top Layer w8: J4.21 1390.55,263.78 v1(1673.23,263.78) ; v1(1830.71,263.78) 1957,263.78 ccw(c1957,317.84) 2011.06,317.84 2011.06,350.19 1972.24,389.02 1972.24,930.5 1955.24,947.5 1955.24,1064.75 LED0.1
  Bottom Layer w8: v1(1673.23,263.78) v1(1830.71,263.78)
PE1: J4.20 LED1.1 | length 1885.9
  Top Layer w8: J4.20 1270.67,143.9 1270.67,205.41 1345.04,279.78 1634.11,279.78 ccw(c1634.11,360.91) 1715.24,360.91 v1(1715.24,1220.02) ; v1(1951.24,1200.02) 1951.24,1167.18 LED1.1
  Bottom Layer w8: v1(1715.24,1220.02) 1733.24,1202.02 1949.24,1202.02 v1(1951.24,1200.02)
PE2: J4.19 LED2.1 | length 1827.2
  Top Layer w8: J4.19 1221.65,201.06 1316.37,295.78 1626.49,295.78 ccw(c1626.49,354.33) 1685.04,354.33 v1(1685.04,1102.36) ; LED2.1 2152.1,1132.18 v1(2152.1,1139.15)
  Bottom Layer w8: v1(1685.04,1102.36) 1712.6,1129.92 2016.14,1129.92 2025.37,1139.15 v1(2152.1,1139.15)
PE3: J4.18 LED3.1 | length 1951.9
  Top Layer w8: J4.18 1170.28,143.5 1170.28,300.2 1202.24,332.16 1202.24,430.58 1517.24,745.58 1517.24,1056.61 1562.24,1101.61 v1(1562.24,1142.02) ; v1(2172.24,1098.46) LED3.1
  Bottom Layer w8: v1(1562.24,1142.02) 1566.14,1145.92 2009.51,1145.92 2024.74,1161.15 2161.21,1161.15 cw(c2161.21,1148.26) 2174.1,1148.26 2174.1,1100.32 v1(2172.24,1098.46)
PE4: J4.17 LED4.1 | length 2125.6
  Top Layer w8: v1(1353.35,145.67) 1373.03,165.35 1373.03,209.81 1402.62,239.4 1696.3,239.4 ccw(c1696.3,283.34) 1740.24,283.34 v1(1740.24,901.02) ; v1(2081.03,1065.07) 2281.84,1065.07 LED4.1
  Bottom Layer w8: J4.17 1170.87,145.67 v1(1353.35,145.67) ; v1(1740.24,901.02) 1740.24,1013.92 cw(c1840.24,1013.92) 1840.24,1113.92 2032.18,1113.92 v1(2081.03,1065.07)
PE5: J4.16 LED5.1 | length 2280.3
  Top Layer w8: v1(2361.24,1098.02) 2413.21,1098.02 LED5.1
  Bottom Layer w8: J4.16 1060.24,94.88 1071.24,105.88 1071.24,221.84 1106.42,257.02 1510.24,257.02 1625.24,372.02 1625.24,442.02 1661.24,478.02 1661.24,713.02 1589.24,785.02 1589.24,830.02 cw(c1617.24,830.02) 1617.24,858.02 1741.24,858.02 ccw(c1741.24,885.02) 1768.24,885.02 1768.24,965.35 1823.91,1021.02 2284.24,1021.02 v1(2361.24,1098.02)
PE6: J4.15 LED6.1 | length 2439.8
  Top Layer w8: v1(1507.87,362.2) 1507.87,458.38 1484.25,482 1484.25,607.03 1645.24,768.02 1645.24,1160.98 1653.54,1169.29 v1(1654.36,1169.29) ; v1(2218.24,1043.02) 2456.64,1043.02 LED6.1
  Bottom Layer w8: J4.15 1188.98,362.2 v1(1507.87,362.2) ; v1(1654.36,1169.29) 1662.21,1177.15 2167.84,1177.15 cw(c2167.84,1126.76) 2218.24,1126.76 v1(2218.24,1043.02)
PE7: J5.26 LED7.1 | length 1582.9
  Top Layer w8: J5.26 1465.55,1638.78 1465.55,1479.7 ccw(c1540.24,1479.7) v1(1540.24,1405.02) ; v1(2469.24,1271.02) 2476.24,1271.02 2582.49,1164.76 2582.49,1126.48 LED7.1
  Bottom Layer w8: v1(1540.24,1405.02) 1689.24,1405.02 1832.24,1262.02 2082.24,1262.02 2091.24,1271.02 v1(2469.24,1271.02)
PE8: J5.27 LED8.1 | length 2610.7
  Top Layer w8: J5.27 1677.24,1739.3 1677.24,1564.29 1768.24,1473.29 1768.24,1010.02 v1(1813.24,965.02) ; v1(2708.24,1027.02) 2708.24,1097.76 LED8.1
  Bottom Layer w8: v1(1813.24,965.02) 1813.24,956.35 1823.86,945.73 1823.86,844.6 2164.02,504.43 2608.24,504.43 ccw(c2608.24,604.43) 2708.24,604.43 v1(2708.24,1027.02)
PE9: J5.28 LED9.1 | length 1958.9
  Top Layer w8: J5.28 1657.24,1659.3 1657.24,1498.02 1749.24,1406.02 1749.24,992.06 1871.22,870.08 v1(1881.89,870.08) ; v1(2765.11,1089.02) 2768.36,1089.02 2777.79,1098.44 LED9.1
  Bottom Layer w8: v1(1881.89,870.08) 2354.33,870.08 2573.27,1089.02 v1(2765.11,1089.02)
PE10: J5.29 LED10.1 | length 2167.6
  Top Layer w8: J5.29 1765.24,1751.3 1765.24,1556.02 1791.24,1530.02 1791.24,1478.13 1784.24,1471.13 1784.24,1025.13 1835.24,974.13 1835.24,960.02 1862.24,933.02 v1(1862.24,928.13) ; v1(2878.24,1063.02) 2878.24,1070.91 LED10.1
  Bottom Layer w8: v1(1862.24,928.13) 1855.86,921.75 1855.86,857.86 1867.57,846.14 2354.89,846.14 2571.77,1063.02 v1(2878.24,1063.02)
PE11: J5.30 LED11.1 | length 2173.5
  Top Layer w8: J5.30 1721.65,1567.6 1769.24,1520.02 v1(1769.24,1509.02) ; v1(2039.24,1385.02) 2039.24,1384.02 2186.24,1237.02 2186.24,1143.25 ccw(c2198.47,1143.25) 2198.47,1131.02 2527.99,1131.02 cw(c2527.99,1118.77) 2540.24,1118.77 2540.24,864.02 ccw(c2597.24,864.02) 2597.24,807.02 2750.24,807.02 ccw(c2750.24,860.4) 2803.62,860.4 2803.62,988.4 2841.24,1026.02 2931.76,1026.02 LED11.1
  Bottom Layer w8: v1(1769.24,1509.02) 1769.24,1473.9 1858.12,1385.02 v1(2039.24,1385.02)
PE12: J5.31 LED12.1 | length 2042.3
  Top Layer w8: J5.31 1871.24,1745.3 1871.24,1668.02 1835.24,1632.02 1835.24,1416.02 1825.24,1406.02 1825.24,1232.02 1822.24,1229.02 v1(1822.24,1224.02) ; v1(2417.24,1196.02) 2434.24,1196.02 v1(2477.24,1153.02) ; v1(3071.24,1203.02) 3071.24,1108.82 ccw(c3081.6,1108.82) 3081.6,1098.46 LED12.1
  Bottom Layer w8: v1(1822.24,1224.02) 2387.24,1224.02 2415.24,1196.02 v1(2417.24,1196.02) ; v1(2477.24,1153.02) 2478.02,1153.8 3019.02,1153.8 3068.24,1203.02 v1(3071.24,1203.02)
PE13: J5.32 LED13.1 | length 2508.6
  Top Layer w8: v1(1813.24,1513.02) 1813.24,1666.02 1821.65,1666.02 J5.32 ; v1(2971.24,1611.02) 2971.24,1378.02 3049.24,1300.02 3049.24,1103.39 ccw(c3081.91,1103.39) 3081.91,1070.71 3173.31,1070.71 LED13.1
  Bottom Layer w8: v1(1813.24,1513.02) 1795.24,1531.02 1760.12,1531.02 ccw(c1760.12,1518.13) 1747.24,1518.13 1747.24,1437.02 1831.24,1353.02 1967.12,1353.02 2006.12,1314.02 2043.24,1314.02 2054.24,1325.02 2142.86,1325.02 2468.86,1651.02 2685.24,1651.02 2729.37,1606.88 2967.1,1606.88 v1(2971.24,1611.02)
PE14: J5.33 LED14.1 | length 2164.5
  Top Layer w8: J5.33 1965.24,1751.3 1965.24,1674.02 2006.24,1633.02 v1(2406.24,1633.02) ; v1(2941.88,1644.88) 2941.88,1275.63 3031.95,1185.56 3031.95,1097.3 ccw(c3074.54,1097.3) 3074.54,1054.71 3255.73,1054.71 LED14.1
  Bottom Layer w8: v1(2406.24,1633.02) 2421.3,1633.02 2468.88,1680.6 2468.88,1705.66 cw(c2510.24,1705.66) 2510.24,1747.02 2832.24,1747.02 cw(c2832.24,1706.02) 2873.24,1706.02 2873.24,1681.79 ccw(c2910.14,1681.79) 2910.14,1644.88 v1(2941.88,1644.88)
PE15: J5.34 LED15.1 | length 2414
  Top Layer w8: v1(1886.24,946.02) 1886.24,1015.02 1844.24,1057.02 1844.24,1384.76 1851.24,1391.76 1851.24,1624.46 J5.34 ; v1(3354.33,1137.8) 3358.57,1137.8 LED15.1
  Bottom Layer w8: v1(1886.24,946.02) 1896.24,936.02 2373.02,936.02 2574.8,1137.8 v1(3354.33,1137.8)
PG3: J5.52 U3.2 U3.3 | length 912.6
  Top Layer w8: U3.3 U3.2 2731.84,930.51 ccw(c2731.84,957.78) 2759.11,957.78 2759.11,1001.04 2835.24,1077.16 2835.24,1580.02 2821.65,1593.6 J5.52
SEGLED1A: *1.7 R4.5 | length 168
  Bottom Layer w8: *1.7 444.1,971.65 444.1,881.88 R4.5
SEGLED1B: *1.6 R4.6 | length 217.5
  Bottom Layer w8: R4.6 444.1,850.39 472.44,850.39 ccw(c472.44,870.08) 492.13,870.08 *1.6
SEGLED1C: *1.4 R4.7 | length 527.4
  Bottom Layer w8: *1.4 539.24,570.73 539.24,752.1 ccw(c472.45,752.1) 472.45,818.89 444.1,818.89 R4.7
SEGLED1D: *1.2 R4.8 | length 662.6
  Bottom Layer w8: *1.2 244.88,476.38 422.25,476.38 522.84,576.96 523.24,577.36 523.24,727.95 ccw(c467.16,727.95) 467.16,784.02 447.48,784.02 446.46,785.04 444.1,787.4 R4.8
SEGLED1DP: *1.5 R5.8 | length 338.9
  Top Layer w8: v1(485.24,610.02) v1(564.24,610.02)
  Bottom Layer w8: R5.8 473.2,622.05 v1(485.24,610.02) ; *1.5@490.55,425.2 *1.5 492.13,497.64 564.24,569.75 v1(564.24,610.02)
SEGLED1E: *1.1 R5.5 | length 664.7
  Bottom Layer w8: *1.1 160.88,492.38 415.63,492.38 507.24,583.99 507.24,680.47 ccw(c471.88,680.47) 471.88,715.82 444.8,715.82 R5.5
SEGLED1F: *1.9 R5.6 | length 527.9
  Bottom Layer w8: *1.9 192.13,968.68 264.03,896.78 264.03,775.3 ccw(c276.73,775.3) 276.73,762.61 383.06,762.61 cw(c383.06,729.43) 416.24,729.43 416.24,698.02 ccw(c429.21,698.02) 429.21,685.04 R5.6
SEGLED1G: *1.10 R5.7 | length 781.8
  Bottom Layer w8: *1.10 94.22,1024.13 100,1024.13 248.03,876.1 248.03,593.02 ccw(c277.62,593.02) 277.62,563.43 364.85,563.43 ccw(c364.85,604.8) 406.21,604.8 406.21,633.48 cw(c426.27,633.48) 426.27,653.54 R5.7
SEGLED2A: *2.7 R10.5 | length 166.4
  Bottom Layer w8: *2.7 977.17,971.65 977.17,881.88 R10.5
SEGLED2B: *2.6 R10.6 | length 208.5
  Bottom Layer w8: R10.6 1002.75,850.4 ccw(c1002.75,872.84) 1025.2,872.84 *2.6
SEGLED2C: *2.4 R10.7 | length 516.4
  Bottom Layer w8: *2.4 1072.49,570.91 1072.49,746.41 ccw(c1005.84,746.41) 1005.84,813.06 986.16,813.06 R10.7
SEGLED2D: *2.2 R10.8 | length 661
  Bottom Layer w8: *2.2 777.95,476.38 955.32,476.38 1055.91,576.96 1056.24,577.29 1056.24,728.02 ccw(c1000.23,728.02) 1000.23,784.02 980.55,784.02 978.74,785.83 977.17,787.4 R10.8
SEGLED2DP: *2.5 R11.8 | length 342.1
  Top Layer w8: v1(1018.24,617.02) 1093.39,617.02 v1(1094.49,618.11)
  Bottom Layer w8: R11.8 985.35,617.02 v1(1018.24,617.02) ; *2.5@1023.62,425.2 *2.5 1025.2,497.64 1094.49,566.93 v1(1094.49,618.11)
SEGLED2E: *2.1 R11.5 | length 660.2
  Bottom Layer w8: *2.1 693.95,492.38 948.7,492.38 1040.24,583.92 1040.24,684.36 ccw(c1008.06,684.36) 1008.06,716.54 R11.5
SEGLED2F: *2.9 R11.6 | length 519.3
  Bottom Layer w8: *2.9 725.2,975.54 799.01,901.73 799.01,776.55 ccw(c812.94,776.55) 812.94,762.61 908.88,762.61 cw(c908.88,721.24) 950.25,721.24 950.25,702.42 ccw(c967.63,702.42) 967.63,685.05 R11.6
SEGLED2G: *2.10 R11.7 | length 777.6
  Bottom Layer w8: *2.10 630.98,1023.62 781.64,872.96 781.64,593.92 ccw(c812.12,593.92) 812.12,563.43 896.34,563.43 ccw(c896.34,604.29) 937.19,604.29 937.19,632.97 cw(c957.25,632.97) 957.25,653.03 979.8,653.03 R11.7
SEGLED3A: *3.7 R15.5 | length 163.3
  Bottom Layer w8: *3.7 1511.81,971.65 R15.5
SEGLED3B: *3.6 R15.6 | length 210.7
  Bottom Layer w8: R15.6 1535.24,850.39 ccw(c1535.24,875) 1559.84,875 *3.6
SEGLED3C: *3.4 R15.7 | length 503.7
  Bottom Layer w8: *3.4 1460.2,423.62 1606.55,569.97 1606.55,738.18 1532.53,812.2 1518.51,812.2 R15.7
SEGLED3D: *3.2 R15.8 | length 650.2
  Bottom Layer w8: *3.2 1260.2,423.62 1312.42,475.84 1489.79,475.84 1590.37,576.42 1590.37,731.01 1535.69,785.69 ccw(c1533.72,783.71) 1533.72,786.51 1512.71,786.51 R15.8
SEGLED3DP: *3.5 R16.8 | length 218.3
  Top Layer w8: v1(1511.81,562.99) 1511.81,539.37 1558.24,492.94 v1(1558.24,479.02)
  Bottom Layer w8: v1(1511.81,562.99) R16.8 ; v1(1558.24,479.02) 1558.24,425.23 *3.5
SEGLED3E: *3.1 R16.5 | length 656.3
  Bottom Layer w8: *3.1 1159.84,429.47 1229.22,498.85 1483.97,498.85 1571.72,586.6 1571.72,678.44 ccw(c1533.63,678.44) 1533.63,716.53 R16.5
SEGLED3F: *3.9 R16.6 | length 522
  Bottom Layer w8: *3.9 1259.84,968.68 1330.5,898.02 1330.5,776.55 ccw(c1344.44,776.55) 1344.44,762.61 1440.38,762.61 cw(c1440.38,722.16) 1480.83,722.16 1480.83,693.97 ccw(c1489.77,693.97) 1489.77,685.04 R16.6
SEGLED3G: *3.10 R16.7 | length 780.5
  Bottom Layer w8: *3.10 1157.21,1024.13 1162.99,1024.13 1313.65,873.47 1313.65,593.4 ccw(c1343.62,593.4) 1343.62,563.43 1404.55,563.43 1405.06,563.94 1428.35,563.94 ccw(c1428.35,604.8) 1469.21,604.8 1469.21,633.48 cw(c1489.27,633.48) 1489.27,653.54 R16.7
pads on no net: J4.3 J4.4 J4.5 J4.6 J4.7 J4.8 J4.9 J4.10 J4.11 J4.12 J4.13 J4.14 J4.22 J4.23 J4.24 J4.25 J4.26 J4.29 J4.30 J4.31 J4.32 J4.33 J4.34 J4.35 J4.36 J4.47 J4.48 J4.49 J4.50 J4.51 J4.52 J4.53 J4.54 J4.55 J4.56 J5.3 J5.8 J5.9 J5.12 J5.13 J5.14 J5.15 J5.16 J5.19 J5.20 J5.21 J5.22 J5.23 J5.24 J5.25 J5.37 J5.38 J5.39 J5.40 J5.51 J5.53 J5.54 J5.55 J5.56 U4.9

## Polygon pours and split planes (outlines as drawn)
GND on Bottom Layer "GND" (solid, remove dead copper, pour order 1): 0,118.11 0,1771.65 cw(c118.11,1771.65) 118.11,1889.76 3425.2,1889.76 cw(c3425.2,1771.65) 3543.31,1771.65 3543.31,118.11 cw(c3425.2,118.11) 3425.2,0 118.11,0 cw(c118.11,118.11)
GND on Top Layer "GND" (solid, remove dead copper, pour order 2): 0,118.11 0,1771.65 cw(c118.11,1771.65) 118.11,1889.76 3425.2,1889.76 cw(c3425.2,1771.65) 3543.31,1771.65 3543.31,118.11 cw(c3425.2,118.11) 3425.2,0 118.11,0 cw(c118.11,118.11)

## Silkscreen, mask and mechanical layers (free items; w line width, h text height)
Top Overlay:
  text "*Made on Earth  / by humans*" at 1742.13,674.21 h60
Bottom Overlay:
  text "JLCJLCJLCJLC" at 1029.24,314.02 h31.5
Mechanical 1:
  the board outline again, w10

## Dimensions
0,1771.65 to 3543.31,1771.65 on Mechanical 1
3425.2,1771.65 to 118.11,1771.65 on Mechanical 1
118.11,1889.76 to 118.11,0 on Mechanical 1
321.65,194.88 to 321.65,1694.88 on Mechanical 1
118.11,1771.65 to 118.11,118.11 on Mechanical 1